# Altium PCB PCB_ISB_V3 - eltplacés.PcbDoc
Units mil, origin at the board's own origin, x right, y up, seen from the top; angles counter-clockwise.
Board outline 6000 x 4000 mil, 2 copper layers (Top Layer, Bottom Layer); 37 components, 35 nets, 96 pads, 0 vias.
Unrouted connection lines stored in the file: 59.
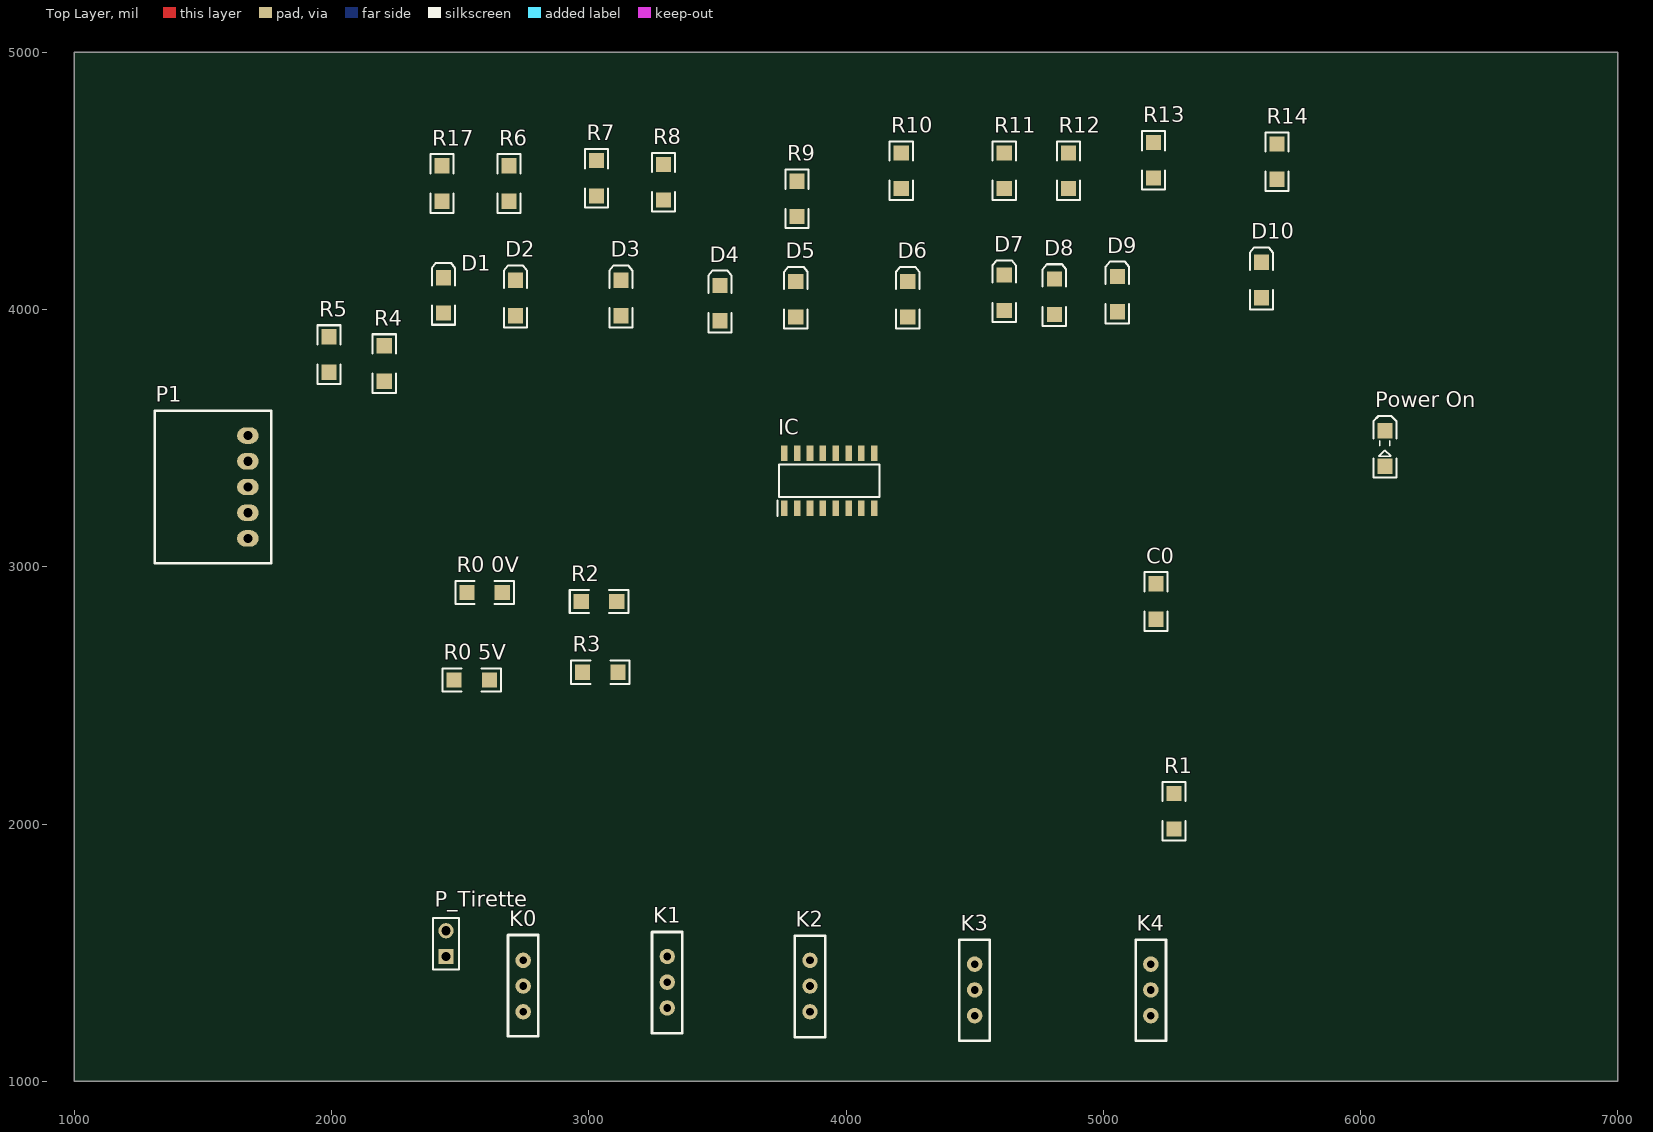
[diagram p0: Top Layer view]
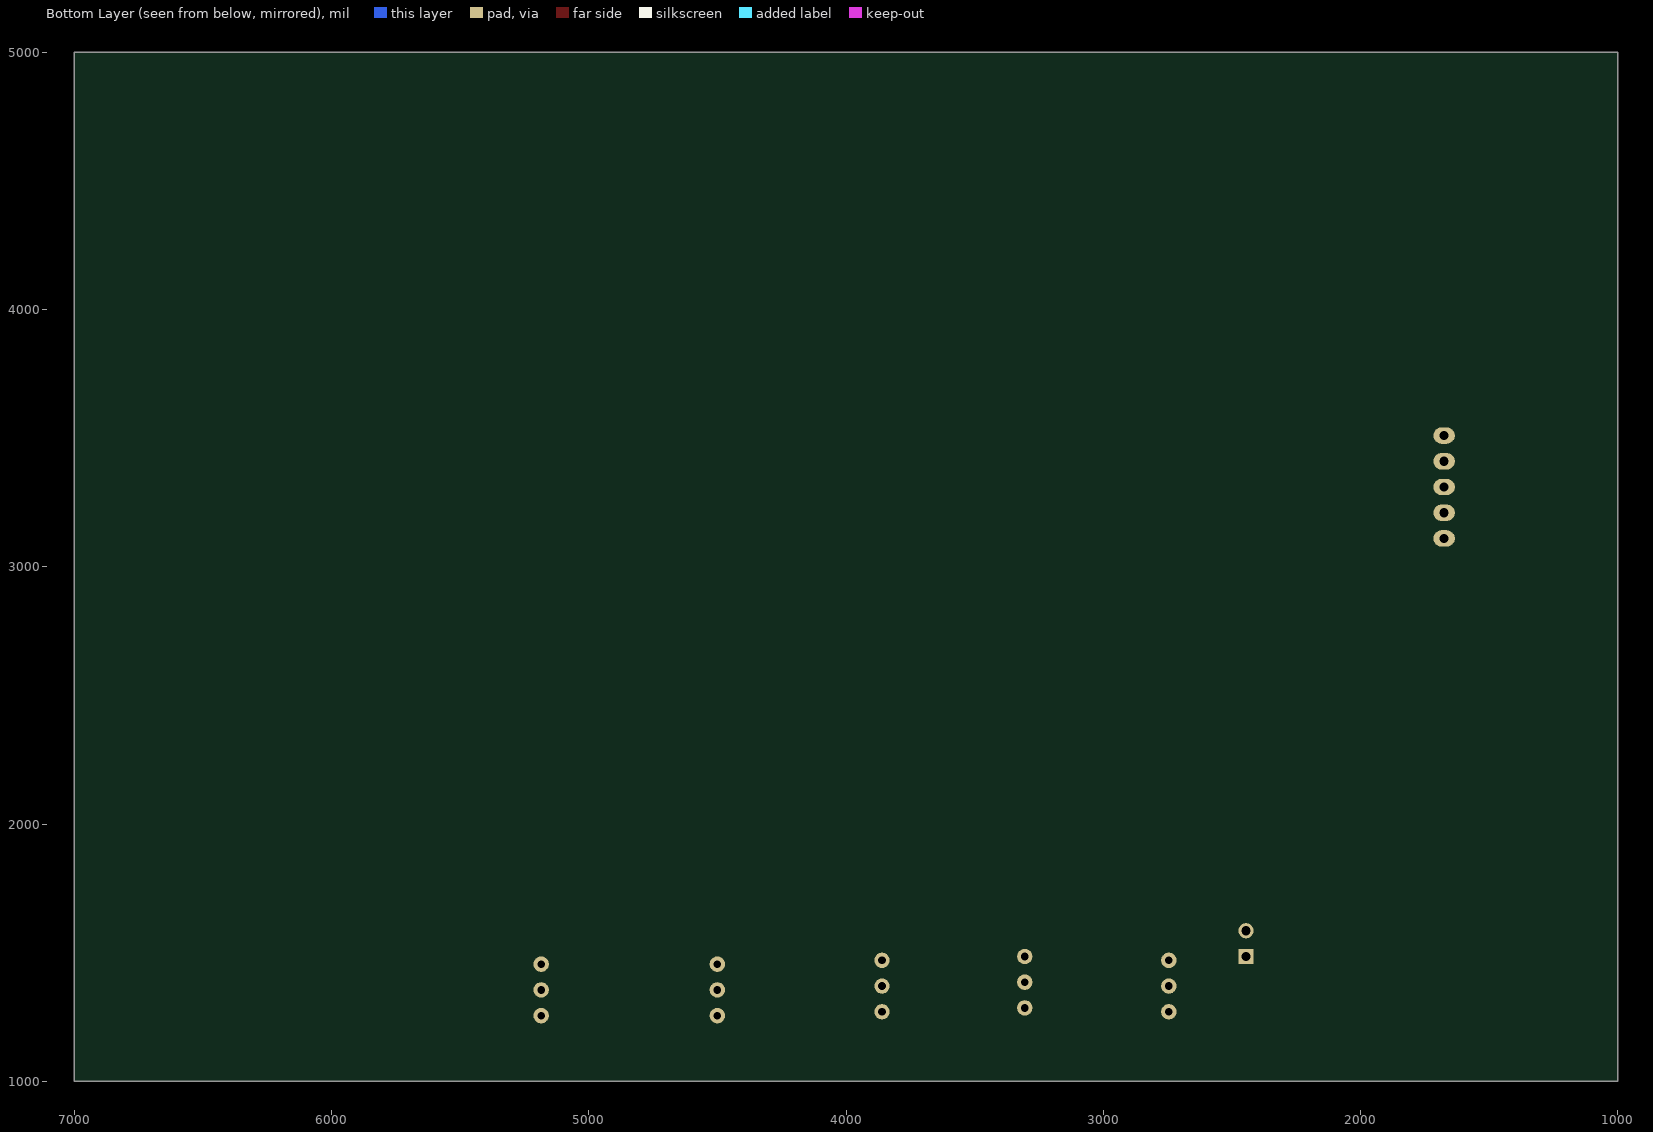
[diagram p1: Bottom Layer view, seen from below]

## Layer stack, top to bottom
Top Solder: solder mask 0.4, Solder Resist, Dk 3.5
Top Layer: signal copper 1.4
Dielectric 1: dielectric 12.6, FR-4, Dk 4.8
Bottom Layer: signal copper 1.4
Bottom Solder: solder mask 0.4, Solder Resist, Dk 3.5

## Board outline
1000,1000 7000,1000 7000,5000 1000,5000

## Design rules (kind name [scope] priority, off if disabled: settings)
Clearance [All] p1: gap=10
PolygonConnect [All] p1: connectstyle=Relief reliefconductorwidth=10 reliefentries=4 polygonreliefangle="90 Angle" airgapwidth=10
RoutingVias [All] p1: holewidth=28 width=50 viastyle="Through Hole" minholewidth=28 minwidth=50 maxholewidth=28 maxwidth=50
SolderMaskExpansion [All] p1: expansion=4
Width [All] p1: maxlimit=10 minlimit=10 preferedwidth=10
30 further rules are at their usual default settings.

## Components (designator, comment, footprint, x,y, rotation, side; value= is the part's Value field where it differs from the comment)
C0 "Cap" "Capacitor 1206" 5205,2865 r90 top
D1 "LED0" 3.2X1.6X1.1 2435,4055 r90 top
D2 "LED0" 3.2X1.6X1.1 2715,4045 r90 top
D3 "LED0" 3.2X1.6X1.1 3125,4045 r90 top
D4 "LED0" 3.2X1.6X1.1 3510,4025 r90 top
D5 "LED0" 3.2X1.6X1.1 3805,4040 r90 top
D6 "LED0" 3.2X1.6X1.1 4240,4040 r90 top
D7 "LED0" 3.2X1.6X1.1 4615,4065 r90 top
D8 "LED0" 3.2X1.6X1.1 4810,4050 r90 top
D9 "LED0" 3.2X1.6X1.1 5055,4060 r90 top
D10 "LED0" 3.2X1.6X1.1 5615,4115 r90 top
IC "PCA9555D,118" SOIC127P600X175-16N 3935,3335 r90 top
K0 "Switch" SWITCH 2745,1470 r270 top
K1 "Switch" SWITCH 3305,1285 r90 top
K2 "Switch" SWITCH 3860,1270 r90 top
K3 "Switch" SWITCH 4500,1255 r90 top
K4 "Switch" SWITCH 5185,1255 r90 top
P1 "Header 5" "JST-XH 5" 1675,3110 r90 top
P_Tirette "Header 2" HDR1X2 2445,1485 r90 top
"Power On" "5V_L" KP-3216SEC 6095,3460 r90 top
"R0 0V" "Res2" "Resistor 1206" 2595,2900 r180 top
"R0 5V" "Res2" "Resistor 1206" 2545,2560 r180 top
R1 "Res2" "Resistor 1206" 5275,2050 r90 top
R2 "Res2" "Resistor 1206" 3040,2865 r180 top
R3 "Res2" "Resistor 1206" 3045,2590 r180 top
R4 "Res2" "Resistor 1206" 2205,3790 r90 top
R5 "Res2" "Resistor 1206" 1990,3825 r90 top
R6 "Res3" "Resistor 1206" 2690,4490 r90 top
R7 "Res3" "Resistor 1206" 3030,4510 r90 top
R8 "Res3" "Resistor 1206" 3290,4495 r90 top
R9 "Res3" "Resistor 1206" 3810,4430 r90 top
R10 "Res3" "Resistor 1206" 4215,4540 r90 top
R11 "Res3" "Resistor 1206" 4615,4540 r90 top
R12 "Res3" "Resistor 1206" 4865,4540 r90 top
R13 "Res3" "Resistor 1206" 5195,4580 r90 top
R14 "Res3" "Resistor 1206" 5675,4575 r90 top
R17 "Res3" "Resistor 1206" 2430,4490 r90 top

## Footprints (in the part's own frame and the unit in brackets; to place one, negate y for a bottom-side part, rotate by r counter-clockwise, add the part's x,y. Pads: shape width x height; smd on the part's side, far side on the other; paste and mask are expansions set on the pad)
3.2X1.6X1.1 [mm] "SMT LED; 2 Flat Leads"
  rect 1.5x1.5 smd: 1(-1.75,0) 2(1.75,0)
  silkscreen extent -2.9,-1.15 3.2,1.15
"Capacitor 1206" [mm]
  rect 1.5x1.5 smd: 1(-1.75,0) 2(1.75,0)
  silkscreen extent -2.89,-1.14 2.89,1.14, body extent -1.98,-0.99 1.98,0.96, height 1.3
HDR1X2 [mm] "Connector; Header; 2 Position"
  rect 1.5x1.5 hole 0.9: 1(0,0)
  round 1.5 hole 0.9: 2(2.54,0)
  silkscreen extent -1.27,-1.27 3.81,1.27
"JST-XH 5" [mm]
  oval 1.624x2.132 hole 0.9: 1(0,0) 2(2.54,0) 3(5.08,0) 4(7.62,0) 5(10.16,0)
  silkscreen extent -2.45,-2.3 12.61,9.2
KP-3216SEC [mm]
  rect 1.5x1.5 smd: 1(-1.75,0) 2(1.75,0)
  silkscreen extent -2.89,-1.14 3.2,1.14, body extent -1.7,-0.79 1.5,0.81, height 1.1
"Resistor 1206" [mm]
  rect 1.5x1.5 smd: 1(-1.75,0) 2(1.75,0)
  silkscreen extent -2.89,-1.14 2.89,1.14, body extent -1.98,-0.95 1.98,0.93, height 0.55
SOIC127P600X175-16N [mm]
  rect 1.525x0.65 smd: 1(-2.712,4.445) 2(-2.712,3.175) 3(-2.712,1.905) 4(-2.712,0.635) 5(-2.712,-0.635) 6(-2.712,-1.905) 7(-2.712,-3.175) 8(-2.712,-4.445) 9(2.712,-4.445) 10(2.712,-3.175) 11(2.712,-1.905) 12(2.712,-0.635) 13(2.712,0.635) 14(2.712,1.905) 15(2.712,3.175) 16(2.712,4.445)
  silkscreen extent -3.47,-4.95 1.6,5.12, body extent -3,-4.95 3,4.95, height 1.75
SWITCH [mil] "2 pos switch,  09.03290.01"
  round 60 hole 30: 0(0,0) 1(100,0) 2(200,0)
  silkscreen extent -98,-59 295,59, body extent -98,-59 295,59, height 291

## Part data
C0: "Capacitor"
D1 D2 D3 D4 D5 D6 D7 D8 D9 D10: "Typical INFRARED GaAs LED"
IC: "Integrated Circuit"
K0 K1 K2 K3 K4: "3 pos switch, 09.03290.01"
P1: "Header, 5-Pin"
P_Tirette: "Header, 2-Pin"
"Power On": library part LED2, "Typical RED, GREEN, YELLOW, AMBER GaAs LED"
"R0 0V" "R0 5V" R1 R2 R3 R4 R5 R6 R7 R8 R9 R10 R11 R12 R13 R14 R17: "Resistor"

## Nets (pads, with @x,y where several pads share a name; then routed paths per layer and width w, separated by ;. In a path a pad name is that pad's centre, name@x,y a point inside that pad or via, vN(x,y) a via of type N, cw(c..) or ccw(c..) an arc to the next point about the centre after c; other vN are vias at no path point)
GND: "R0 0V.1" IC.12 K0.2 K1.2 K2.2 K3.2 K4.2 P1.1 R1.1 R2.2 R4.2 R6.2 R7.2 R8.2 R9.2 R10.2 R11.2 R12.2 R13.2 R14.2 R17.2
NetD1_1: D1.1
NetD1_2: D1.2 R17.1
NetD2_1: D2.1
NetD2_2: D2.2 R6.1
NetD3_1: D3.1
NetD3_2: D3.2 R7.1
NetD4_1: D4.1
NetD4_2: D4.2 R8.1
NetD5_1: D5.1 IC.16
NetD5_2: D5.2 R9.1
NetD6_1: D6.1 IC.15
NetD6_2: D6.2 R10.1
NetD7_1: D7.1 IC.14
NetD7_2: D7.2 R11.1
NetD8_1: D8.1 IC.13
NetD8_2: D8.2 R12.1
NetD9_1: D9.1 IC.11
NetD9_2: D9.2 R13.1
NetD10_1: D10.1 IC.10
NetD10_2: D10.2 R14.1
NetIC_1: IC.1 P1.2
NetIC_2: IC.2 R2.1 R3.1
NetIC_3: "R0 0V.2" "R0 5V.1" IC.3
NetIC_4: IC.4 K0.1
NetIC_5: IC.5 K1.1
NetIC_6: IC.6 K2.1
NetIC_7: IC.7 K3.1
NetIC_8: IC.8 K4.1
NetIC_9: IC.9 P_Tirette.2
NetIC_21: R4.1 R5.1
NetIC_22: P1.4
NetIC_23: P1.3
"NetPower On_2": "Power On.2" R1.2
VCC: "Power On.1" "R0 5V.2" K0.0 K1.0 K2.0 K3.0 K4.0 P1.5 P_Tirette.1 R3.2 R5.2
pads on no net: C0.1 C0.2